# EAGLE board OLED3D (EAGLE 6.6.0)
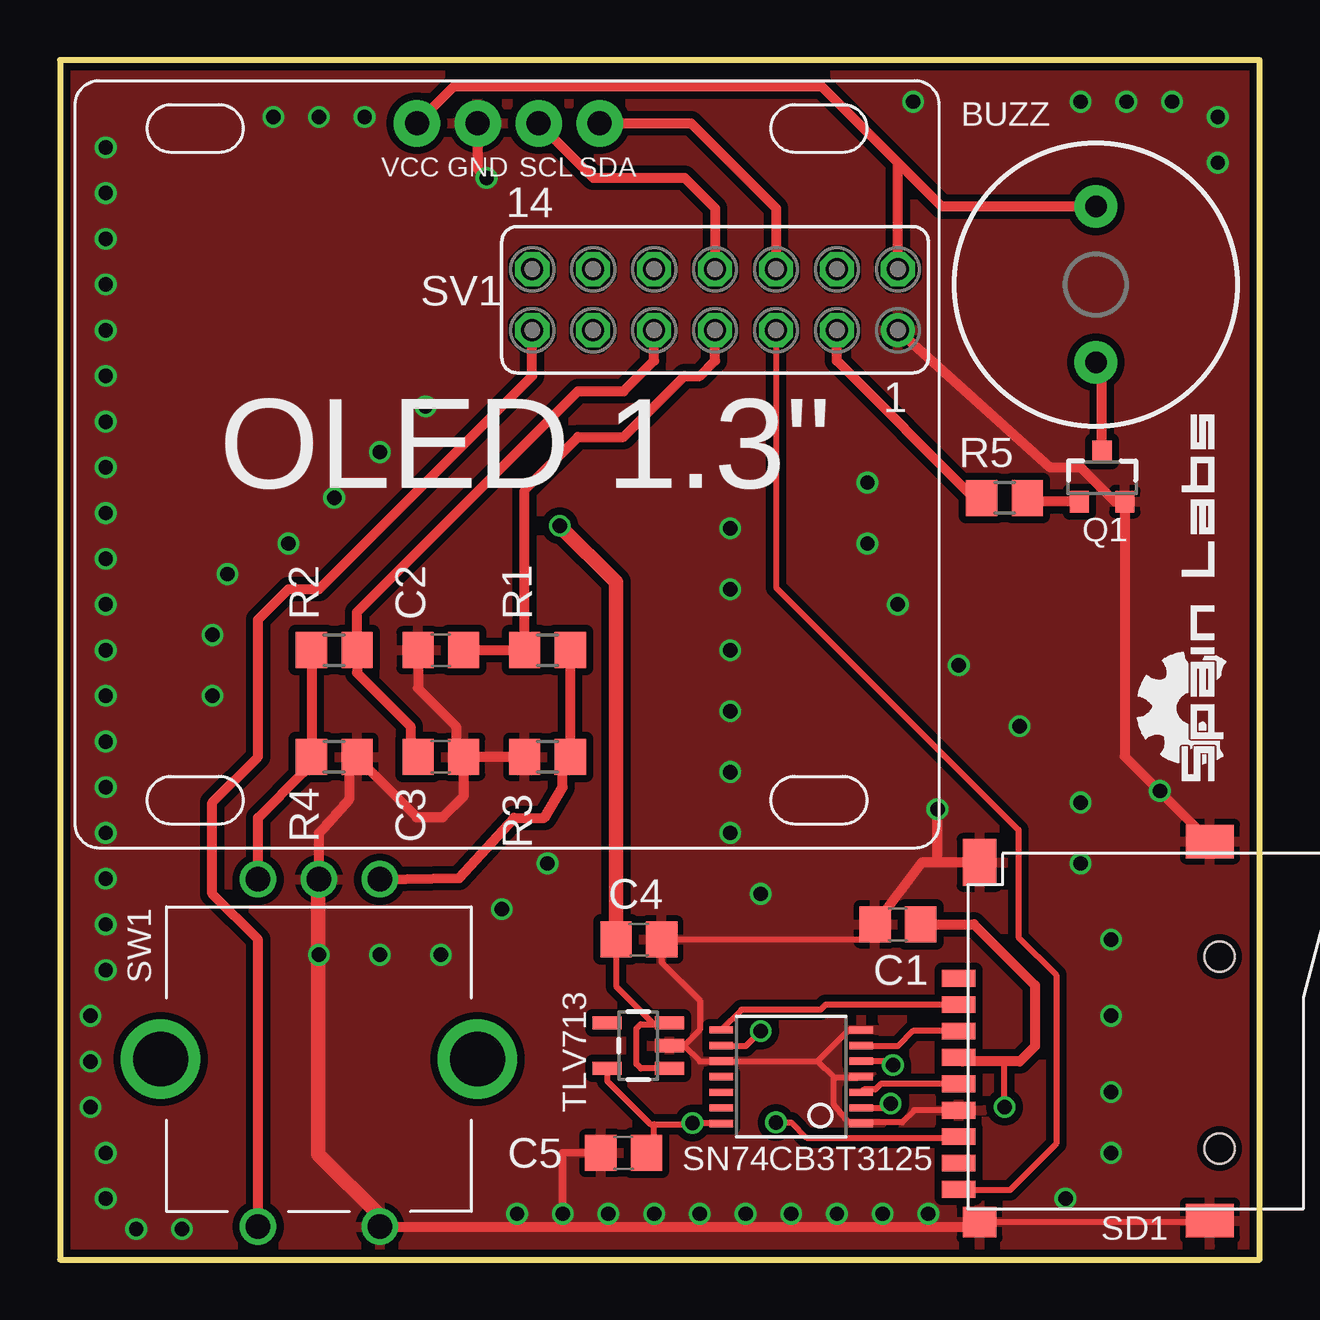
[diagram p0: board, top side]
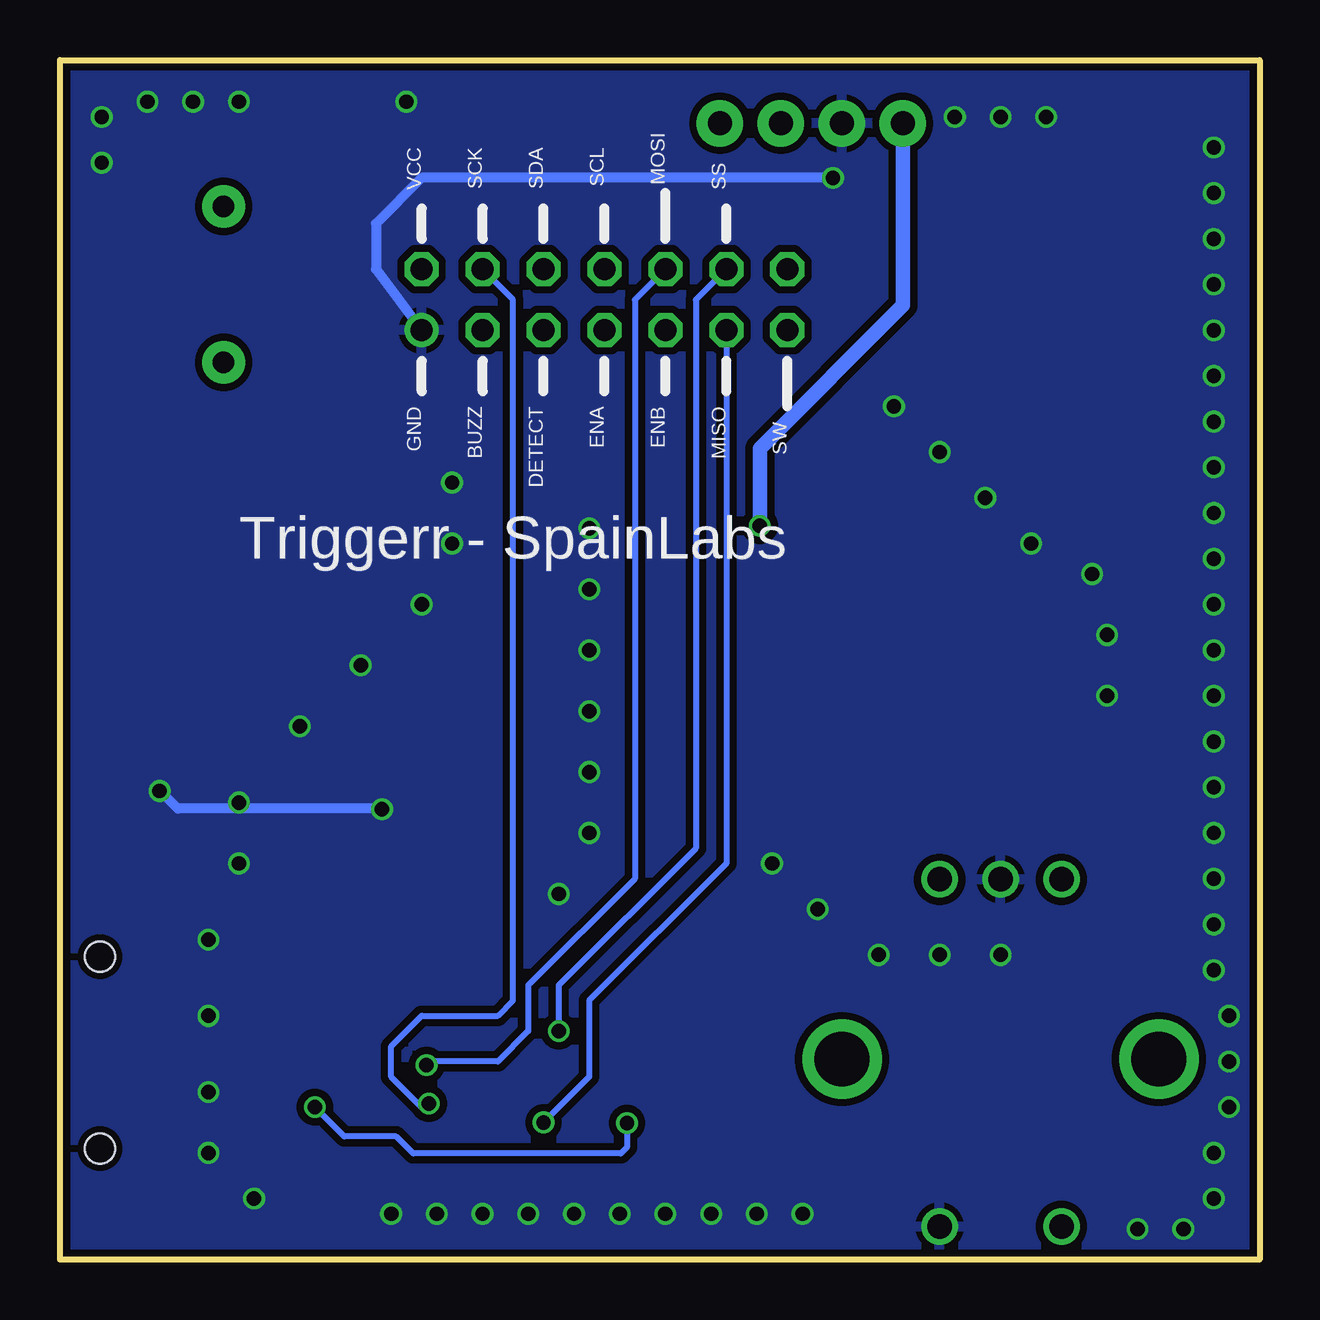
[diagram p1: board, bottom side, seen from below]

Size 50 x 50 mm. Coordinates in mm from the lower left corner, seen from the top.
Outline: 0,0 50,0 50,50 0,50 0,0
Copper layers (1*16): Top 0.035mm / dielectric 1.5mm / Bottom 0.035mm
Design rules "Elecrow_2-layer_eagle_rule": minimum track width 6mil, minimum drill 12mil, track to track 6mil, track to pad 6mil, pad to pad 6mil, via to via 6mil, smd to smd 0mil, copper to edge 10mil, drill to drill 10mil, minimum pad ring 10mil, minimum via ring 6mil, stop-mask expansion 2mil, vias tented up to drill 100mil, thermal gap 10mil

## Footprints (pad centres in the part's own frame; a part is rotated, then mirrored left to right if it is on the bottom)
BUZZER-12MM = drill 0.9 pad 1.778: + 3.25,0; - -3.25,0
C0805 = smd 1.3 x 1.5: 1 -0.95,0; 2 0.95,0
OLED-1.3 = drill 1 pad 1.93: GND 16.78,30.21; SCL 19.32,30.21; SDA 21.86,30.21; VCC 14.24,30.21
SOT23-3 = smd 0.8 x 0.9: 1 -0.95,-1; 2 0.95,-1; 3 0,1.1
R0805 = smd 1.3 x 1.5: 1 -0.95,0; 2 0.95,0
TF-PULL = smd 0.7 x 1.4: 1 -2.2,-7.62; 2 -1.1,-7.62; 3 0,-7.62; 4 1.1,-7.62; 5 2.2,-7.62; 6 3.3,-7.62; 7 4.4,-7.62; 8 5.5,-7.62; 9 6.6,-7.62 | smd 1.4 x 2: S1 -7.9,2.85; S2 7.9,2.85 | smd 1.28 x 1.4: S3 7.96,-6.75 | smd 1.95 x 1.4: S4 -7.025,-6.75 | hole 1.25: -3.1,3.25; 4.9,3.25
TSSOP14 = smd 0.305 x 0.991: 1 -1.95,-2.918; 2 -1.3,-2.918; 3 -0.65,-2.918; 4 0,-2.918; 5 0.65,-2.918; 6 1.3,-2.918; 7 1.95,-2.918; 8 1.95,2.918; 9 1.3,2.918; 10 0.65,2.918; 11 0,2.918; 12 -0.65,2.918; 13 -1.3,2.918; 14 -1.95,2.918
FE07-2 = drill 0.914: 1 -7.62,1.27 | drill 0.914 octagon: 2 -7.62,-1.27; 3 -5.08,1.27; 4 -5.08,-1.27; 5 -2.54,1.27; 6 -2.54,-1.27; 7 0,1.27; 8 0,-1.27; 9 2.54,1.27; 10 2.54,-1.27; 11 5.08,1.27; 12 5.08,-1.27; 13 7.62,1.27; 14 7.62,-1.27
ROTARY_ENC_PLAIN = drill 1.016: A 7.493,-2.54; B 7.493,2.54; C 7.493,0; SW+ -6.985,2.54; SW- -6.985,-2.54 | drill 2.286: P$3 0,6.604; P$4 0,-6.604
SOT23-5 = smd 0.55 x 1.2: 1 -0.95,-1.3; 2 0,-1.3; 3 0.95,-1.3; 4 0.95,1.3; 5 -0.95,1.3

## Placement (x,y rotation side)
BUZZ  BUZZERPTH  [BUZZER-12MM]  43.18,40.64 90 top
C1  1uF  [C0805]  34.92,13.97 180 top
C2  10n  [C0805]  15.88,25.4 0 top
C3  10n  [C0805]  15.88,20.95 180 top
C4  1uF  [C0805]  24.13,13.34 0 top
C5  1uF  [C0805]  23.5,4.45 180 top
OLED  OLED-1.3  [OLED-1.3]  0.64,17.14 0 top
Q1  MMBT2222A  [SOT23-3]  43.43,32.59 0 top
R1  10K  [R0805]  20.32,25.4 0 top
R2  10K  [R0805]  11.43,25.4 0 top
R3  120K  [R0805]  20.32,20.95 0 top
R4  120K  [R0805]  11.43,20.95 180 top
R5  270  [R0805]  39.37,31.75 0 top
SD1  TF-HOLDER  [TF-PULL]  45.09,9.53 270 top
SN74CB3T3125  SN74CB3T3125  [TSSOP14]  30.48,7.62 90 top
SV1  [FE07-2]  27.3,40.01 180 top
SW1  ROTARTY_ENCODER  [ROTARY_ENC_PLAIN]  10.79,8.36 90 top
TLV713  TLV713  [SOT23-5]  24.1,8.92 90 top
U$1  [SL]  48.9,19.68 90 top

## Library data of the parts
BUZZ SW1 = SparkFun-Electromechanical
C1-C5 R1-R5 = rcl
OLED SN74CB3T3125 TLV713 = Triggerr
Q1 = SparkFun-DiscreteSemi; PROD_ID: TRANS-08049
SD1 = sd-mmc
SV1 = con-lsta; OC_FARNELL: unknown; OC_NEWARK: unknown
U$1 = SL

## Nets
3.3V: C1.1 C5.1 SD1.4 SN74CB3T3125.14 TLV713.5
A: C2.2 R1.1 SV1.7
B: C3.2 R2.2 SV1.9
BUZZ: R5.1 SV1.3
CLK: SD1.5 SN74CB3T3125.3
CS: SD1.2 SN74CB3T3125.8
DETECT: SD1.9 SV1.5
DIN: SD1.3 SN74CB3T3125.6
DOUT: SD1.7 SV1.11
GND: C1.2 C2.1 C3.1 C4.2 C5.2 OLED.GND Q1.2 R3.1 R4.1 SD1.6 SD1.S1 SD1.S2 SD1.S3 SD1.S4 SN74CB3T3125.1 SN74CB3T3125.4 SN74CB3T3125.7 SN74CB3T3125.10 SV1.1 SW1.C SW1.SW- TLV713.2
N$1: Q1.1 R5.2
N$2: BUZZ.- Q1.3
N$3: R2.1 R4.2 SW1.B
N$5: R1.2 R3.2 SW1.A
SCL: OLED.SCL SV1.8
SCLK: SN74CB3T3125.2 SV1.4
SCS: SN74CB3T3125.9 SV1.12
SDA: OLED.SDA SV1.6
SDI: SN74CB3T3125.5 SV1.10
SW: SV1.13 SW1.SW+
VCC: BUZZ.+ C4.1 OLED.VCC SV1.2 TLV713.1 TLV713.3

## Tracks (layer width: path | path; a pad name or v marks a point on that pad's centre or on a via)
3.3V  (via drill 0.6)
  Top 0.254: SN74CB3T3125.14 26.39,5.67 v26.36,5.69 26.31,5.64 24.77,5.64 | TLV713.5 22.8,7.45 24.61,5.64 24.77,5.64 | v39.37,6.35 39.37,8.26 | 24.77,4.45 24.77,5.64
  Top 0.305: C5.1 24.77,4.45
  Top 0.406: C1.1 38.1,13.97 40.64,11.43 40.64,8.89 40.01,8.26 39.37,8.26 37.63,8.26 SD1.4
  Bottom 0.254: v26.36,5.69 26.36,4.67 26.62,4.42 35.28,4.42 35.99,5.13 38.15,5.13 v39.37,6.35
A
  Top 0.406: C2.2 R1.1 19.37,32.07 21.59,34.29 23.5,34.29 26.04,36.83 26.67,36.83 27.3,37.47 SV1.7
B
  Top 0.406: C3.2 14.61,21.27 14.61,22.23 12.38,24.45 R2.2 12.38,26.98 21.59,36.2 23.5,36.2 24.77,37.47 SV1.9
BUZZ
  Top 0.406: R5.1 38.1,31.75 32.38,37.47 SV1.3
CLK
  Top 0.254: SD1.5 34.22,7.33 33.98,7.09 33.51,7.09 SN74CB3T3125.3
CS
  Top 0.254: SD1.2 31.91,10.62 31.7,10.41 28.41,10.41 SN74CB3T3125.8
DETECT
  Top 0.254: SV1.5 29.84,28.02 39.95,17.91 39.95,13.44 41.53,11.86 41.53,4.83 39.6,2.9 37.49,2.9 SD1.9
DIN
  Top 0.254: SD1.3 35.56,9.53 34.92,8.89 33.43,8.89 SN74CB3T3125.6
DOUT  (via drill 0.6)
  Top 0.254: v29.84,5.71 30.48,5.71 31.11,5.08 37.42,5.08 SD1.7
  Bottom 0.254: SV1.11 22.23,16.51 27.94,10.79 27.94,7.62 v29.84,5.71
GND  (via drill 0.6)
  Top 0.254: SD1.6 35.61,6.22 35.1,5.71 33.44,5.71 | 33.44,5.71 SN74CB3T3125.1 | 31.58,8.27 SN74CB3T3125.10 27.55,8.26 26.67,8.26 26.01,8.91 | 31.58,8.27 32.26,7.59 | 32.26,7.59 33.37,7.59 SN74CB3T3125.4 | SN74CB3T3125.7 32.88,9.57 31.58,8.27 | 33.44,5.71 32.87,5.71 32.26,6.45 32.26,7.59 | SD1.S3 47.88,1.56 SD1.S2 | TLV713.2 26.01,8.91 | 26.01,8.91 26.67,9.58 26.67,10.79 25.08,12.38 C4.2 33.34,13.34 C1.2
  Top 0.305: C5.2 20.95,4.45 v20.95,1.91
  Top 0.406: C2.1 14.93,23.81 16.51,22.23 16.51,21.59 | 16.51,21.59 16.51,21.27 C3.1 16.87,20.91 16.87,20.37 16.84,20.34 16.84,19.33 15.95,18.44 14.86,18.44 12.38,20.92 R4.1 12.06,20.64 12.06,19.2 10.79,17.78 SW1.C 10.77,15.88 10.77,16.33 | R3.1 17.14,20.95 16.51,21.59 | 37.99,1.91 SD1.S3 38.14,1.37 SW1.SW- 13.39,1.42 13.39,1.78 | OLED.GND 17.41,45.45 v17.78,45.09 | SD1.S4 35.92,16.55 C1.2 | SD1.S1 44.38,20.98 Q1.2 43.98,31.59 42.55,33.02 41.27,33.02 SV1.1 | 36.58,16.59 v36.58,18.77 36.55,18.8
  Top 0.61: 10.77,16.33 10.77,4.39 13.39,1.78
  Bottom 0.406: v17.78,45.09 34.92,45.09 36.83,43.18 36.83,41.27 SV1.1 | 36.55,18.8 45.09,18.8 45.82,19.53 45.82,19.54 45.67,19.69
  other vias: 19.05,1.91 22.86,1.91 24.77,1.91 26.67,1.91 28.57,1.91 30.48,1.91 32.38,1.91 34.29,1.91 36.2,1.91 45.85,19.53 1.91,44.45 1.91,42.55 1.91,40.64 1.91,38.73 1.91,36.83 1.91,34.92 1.91,33.02 1.91,31.11 1.91,29.21 1.91,27.3 1.91,25.4 1.91,23.5 1.91,21.59 1.91,19.68 1.91,17.78 1.91,15.88 1.91,13.97 1.91,12.06 1.27,10.16 1.27,8.26 1.27,6.35 1.91,4.45 1.91,2.54 3.17,1.27 5.08,1.27 1.91,46.35 12.7,47.62 10.79,47.62 8.89,47.62 35.56,48.26 42.55,48.26 44.45,48.26 46.35,48.26 48.26,47.62 48.26,45.72 27.94,30.48 27.94,27.94 27.94,25.4 27.94,22.86 27.94,20.32 27.94,17.78 29.21,15.24 33.66,32.38 33.66,29.84 34.92,27.3 37.47,24.77 40.01,22.23 15.24,35.56 13.34,33.66 11.43,31.75 9.53,29.84 6.99,28.57 6.35,26.04 6.35,23.5 10.79,12.7 13.34,12.7 15.88,12.7 18.41,14.61 20.32,16.51 42.55,19.05 42.55,16.51 43.81,13.34 43.81,10.16 43.81,6.99 43.81,4.45 41.91,2.54
  pour Top (isolate 0.305): 0,0 50,0 50,50 0,50
  pour Bottom (isolate 0.305): 0,0 50,0 50,50 0,50
N$1
  Top 0.406: Q1.1 40.48,31.59 R5.2
N$2
  Top 0.406: Q1.3 43.43,37.14 BUZZ.-
N$3
  Top 0.406: R2.1 R4.2 10.16,20.64 10.16,20.32 8.26,18.41 SW1.B
N$5
  Top 0.406: R1.2 R3.2 20.95,20.64 20.95,19.68 20.19,18.41 18.92,18.41 16.64,15.9 SW1.A
SCL
  Top 0.406: OLED.SCL 22.23,45.09 26.04,45.09 27.3,43.81 SV1.8
SCLK  (via drill 0.6)
  Top 0.254: SN74CB3T3125.2 34.26,6.32 v34.62,6.5
  Bottom 0.254: v34.62,6.5 34.92,6.35 36.2,7.62 36.2,8.89 34.92,10.16 31.75,10.16 31.11,10.79 31.11,40.01 SV1.4
SCS  (via drill 0.6)
  Top 0.254: v29.21,9.53 28.57,8.89 27.59,8.89 SN74CB3T3125.9
  Bottom 0.254: SV1.12 23.5,40.01 23.5,17.14 29.21,11.43 v29.21,9.53
SDA
  Top 0.406: OLED.SDA 26.3,47.35 29.84,43.81 SV1.6
SDI  (via drill 0.6)
  Top 0.254: v34.72,8.1 34.47,8.26 33.41,8.26 SN74CB3T3125.5
  Bottom 0.254: SV1.10 26.04,40.01 26.04,15.88 30.48,11.43 30.48,9.53 31.75,8.26 34.47,8.26 v34.72,8.1
SW
  Top 0.406: SW1.SW+ 8.26,13.34 6.35,15.24 6.35,19.05 8.26,20.95 8.26,26.67 9.53,27.94 10.79,27.94 19.68,36.83 SV1.13
VCC  (via drill 0.6)
  Top 0.254: TLV713.1 24.22,7.96 24.03,8.15 24.03,9.63 24.21,9.8 24.77,9.8 | 24.77,9.8 25.34,9.8 TLV713.3 | C4.1 23.18,11.39 24.77,9.8
  Top 0.406: SV1.2 34.92,45.72 | 34.92,45.72 31.75,48.9 16.41,48.9 OLED.VCC | BUZZ.+ 36.76,43.89 34.92,45.72
  Top 0.61: C4.1 23.18,28.23 v20.83,30.58
  Bottom 0.61: v20.83,30.58 20.83,33.81 14.86,39.78 14.86,47.34 OLED.VCC

## Text on the board
bNames: MOSI | SS | SCL | SDA | SCK | VCC | MISO | ENB | ENA | DETECT | BUZZ | GND | SW | Triggerr - SpainLabs